# EAGLE board smart_probe (EAGLE 9.6.0)
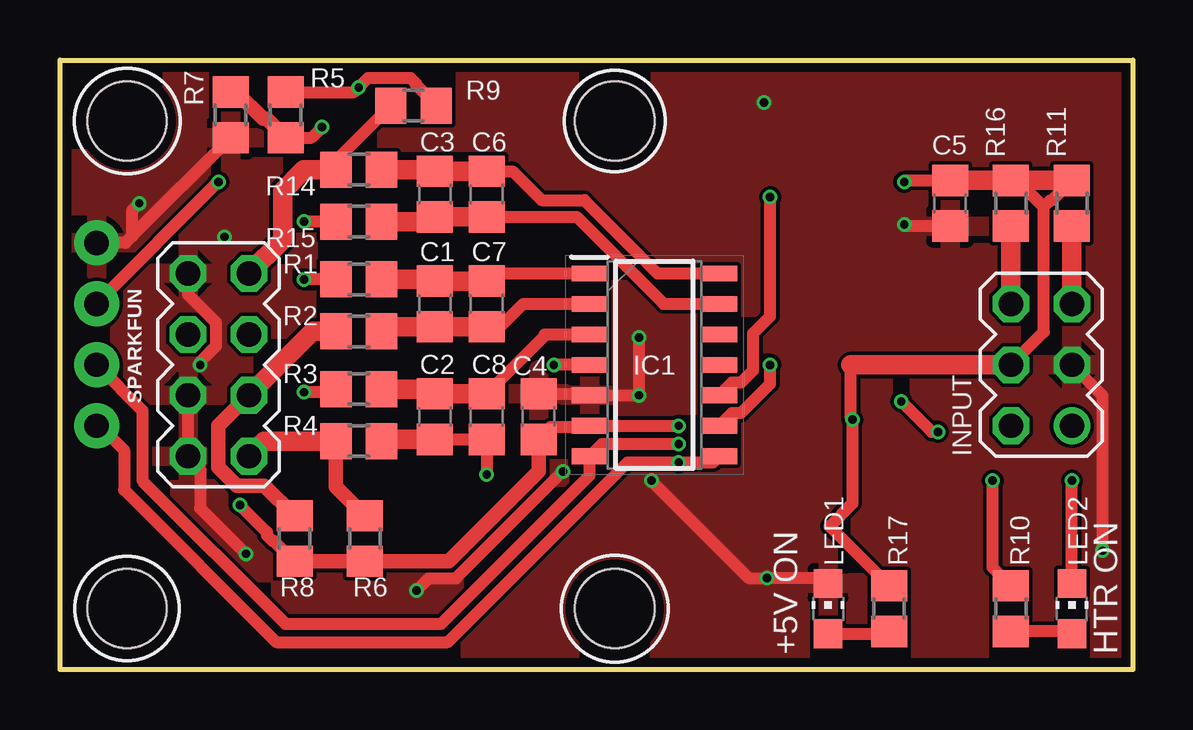
[diagram p0: board, top side]
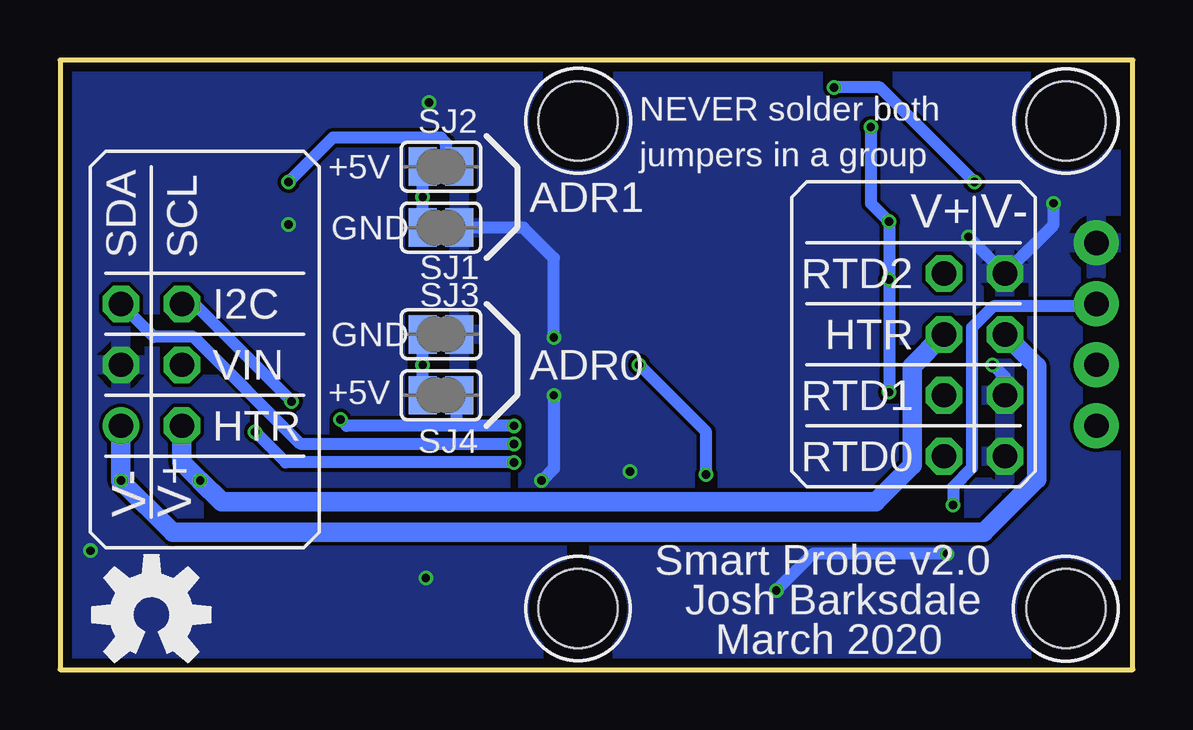
[diagram p1: board, bottom side, seen from below]

Size 44.7 x 25.4 mm. Coordinates in mm from the lower left corner, seen from the top.
Outline: 44.7,0 0,0 0,25.4 44.7,25.4 44.7,0
Copper layers (1*16): Top 0.035559375mm / dielectric 1.6mm / Bottom 0.035559375mm
Design rules "oshpark_2layer": minimum track width 6mil, minimum drill 10mil, track to track 6mil, track to pad 6mil, pad to pad 6mil, via to via 6mil, smd to smd 6mil, copper to edge 15mil, drill to drill 6mil, minimum pad ring 5mil, minimum via ring 5mil, stop-mask expansion 2.5mil, vias tented up to drill 0mil, thermal gap 10mil

## Footprints (pad centres in the part's own frame; a part is rotated, then mirrored left to right if it is on the bottom)
C0805 = smd 1.3 x 1.5: 1 -0.95,0; 2 0.95,0
STAND-OFF = hole 3.302: 0,0
SOIC127P600X175-14N = smd 1.5 x 0.65: 1 -2.7,3.81; 2 -2.7,2.54; 3 -2.7,1.27; 4 -2.7,0; 5 -2.7,-1.27; 6 -2.7,-2.54; 7 -2.7,-3.81; 8 2.7,-3.81; 9 2.7,-2.54; 10 2.7,-1.27; 11 2.7,0; 12 2.7,1.27; 13 2.7,2.54; 14 2.7,3.81
MA03-2 = drill 1.016: 1 -2.54,-1.27 | drill 1.016 octagon: 2 -2.54,1.27; 3 0,-1.27; 4 0,1.27; 5 2.54,-1.27; 6 2.54,1.27
CHIP-LED0805 = smd 1.2 x 1.2: A 0,-1.05; C 0,1.05
MA04-2 = drill 1.016 octagon: 1 -3.81,-1.27; 2 -3.81,1.27; 3 -1.27,-1.27; 4 -1.27,1.27; 5 1.27,-1.27; 6 1.27,1.27; 7 3.81,-1.27; 8 3.81,1.27
R0805 = smd 1.3 x 1.5: 1 -0.95,0; 2 0.95,0
SJ = smd 1.168 x 1.6: 1 -0.762,0; 2 0.762,0
1X04_NO_SILK = drill 1.016 pad 1.88: 1 0,0; 2 2.54,0; 3 5.08,0; 4 7.62,0

## Placement (x,y rotation side)
C1  1u  [C0805]  15.62,15.24 270 top
C2  1u  [C0805]  15.62,10.54 270 top
C3  1u  [C0805]  15.62,19.81 270 top
C4  0.1u  [C0805]  19.94,10.54 90 top
C5  47uF  [C0805]  37.08,19.43 270 top
C6  0.1u  [C0805]  17.78,19.81 270 top
C7  0.1u  [C0805]  17.78,15.24 270 top
C8  0.1u  [C0805]  17.78,10.54 270 top
H1  STAND-OFF  [STAND-OFF]  23.11,2.54 90 top
H2  STAND-OFF  [STAND-OFF]  23.11,22.86 90 top
H3  STAND-OFF  [STAND-OFF]  2.79,2.54 90 top
H4  STAND-OFF  [STAND-OFF]  2.79,22.86 90 top
IC1  MCP3424-E_SL  [SOIC127P600X175-14N]  24.76,12.7 0 top
INPUT  [MA03-2]  40.89,12.7 90 top
LED1  [CHIP-LED0805]  32,2.54 0 top
LED2  [CHIP-LED0805]  42.16,2.54 0 top
LOGO1  OSHW-LOGOM  [OSHW-LOGO-M]  40.89,2.29 0 bottom
PROBE  [MA04-2]  6.6,12.7 270 top
R1  40k  [R0805]  12.45,16.26 0 top
R2  40k  [R0805]  12.45,14.1 0 top
R3  40k  [R0805]  12.45,11.68 0 top
R4  40k  [R0805]  12.45,9.53 0 top
R5  910  [R0805]  9.4,23.11 90 top
R6  910  [R0805]  12.7,5.46 270 top
R7  100  [R0805]  7.11,23.11 90 top
R8  910  [R0805]  9.78,5.46 270 top
R9  910  [R0805]  14.73,23.5 0 top
R10  5k  [R0805]  39.62,2.54 90 top
R11  5k  [R0805]  42.16,19.43 90 top
R14  40k  [R0805]  12.45,20.83 180 top
R15  40k  [R0805]  12.45,18.67 180 top
R16  5k  [R0805]  39.62,19.43 90 top
R17  1.5k  [R0805]  34.54,2.54 90 top
SJ1  [SJ]  28.83,18.41 0 bottom
SJ2  [SJ]  28.83,20.96 0 bottom
SJ3  [SJ]  28.83,13.97 0 bottom
SJ4  [SJ]  28.83,11.43 0 bottom
SPARKFUN  [1X04_NO_SILK]  1.52,17.78 270 top

## Library data of the parts
C1-C8 = rcl; SPICEPREFIX: C
H1-H4 = SparkFun-Hardware
IC1 = MCP3424-E_SL; ALLIED_NUMBER: 70046797; ALLIED_PRICE-STOCK: http://www.alliedelec.com/microchip-technology-inc-mcp3424-e-sl/70046797/; DESCRIPTION: ADC 18-Bit 4-ch 2.048V I2C SOIC14; HEIGHT: 1.75mm; MANUFACTURER_NAME: Microchip; MANUFACTURER_PART_NUMBER: MCP3424-E/SL; MOUSER_PART_NUMBER: 579-MCP3424-E/SL; MOUSER_PRICE-STOCK: https://www.mouser.com/Search/Refine.aspx?Keyword=579-MCP3424-E%2FSL; RS_PART_NUMBER: 6696086P; RS_PRICE-STOCK: http://uk.rs-online.com/web/p/products/6696086P
INPUT PROBE = better_header; OC_FARNELL: unknown; OC_NEWARK: unknown
LED1 LED2 = led
LOGO1 = SparkFun-Aesthetics
R1-R11 R14-R17 = rcl; SPICEPREFIX: R
SJ1-SJ4 = jumper
SPARKFUN = SparkX

## Nets
+5V: C4.1 C5.1 IC1.6 INPUT.4 R5.2 R6.2 R8.2 R9.2 R11.2 R16.2 R17.2 SJ2.2 SJ4.2 SPARKFUN.2
CH1+: C1.1 C7.1 IC1.1 R1.2
CH1-: C1.2 C7.2 IC1.2 R2.2
CH2+: C2.1 C8.1 IC1.3 R3.2
CH2-: C2.2 C8.2 IC1.4 R4.2
CH3+: IC1.11
CH3-: IC1.12
CH4+: C3.2 C6.2 IC1.13 R15.1
CH4-: C3.1 C6.1 IC1.14 R14.1
GND: C4.2 C5.2 IC1.5 INPUT.3 LED1.C PROBE.1 PROBE.5 PROBE.7 R7.1 SJ1.2 SJ3.2 SPARKFUN.1
HTR+: INPUT.2 PROBE.4 R10.2
HTR-: INPUT.1 LED2.C PROBE.3
N$1: LED1.A R17.1
N$2: LED2.A R10.1
N$4: IC1.10 SJ1.1 SJ2.1
N$5: IC1.9 SJ3.1 SJ4.1
RTD0+: PROBE.8 R4.1 R6.1
RTD1+: PROBE.6 R2.1 R8.1
RTD2+: PROBE.2 R9.1 R14.2
SCL(BYPASS): IC1.8 INPUT.6 R16.1 SPARKFUN.4
SDA(BYPASS): IC1.7 INPUT.5 R11.1 SPARKFUN.3
VREF: R1.1 R3.1 R5.1 R7.2 R15.2

## Tracks (layer width: path | path; a pad name or v marks a point on that pad's centre or on a via)
+5V  (via drill 0.35)
  Top 0.508: C4.1 20.45,10.1 21.62,10.1 21.65,10.13 22.03,10.13 IC1.6 v25.78,10.16 | R5.2 12.25,24.06 v12.45,24.26 12.84,24.65 14.6,24.65 14.84,24.41 14.84,24.34 R9.2 | R17.2 32.06,5.97 33.02,6.92 v33.02,10.41 32.95,10.48 32.95,12.7 | SPARKFUN.2 v6.6,20.32 | v7.49,6.86 8.62,5.73 8.62,5.59 8.86,5.36 8.94,5.36 R8.2 | INPUT.4 41,14.07 41,19.29 | R11.2 41.32,19.54 41.25,19.54 41,19.29 | 41,19.29 39.9,20.38 R16.2 | v35.18,20.32 35.24,20.38 C5.1
  Top 0.61: C4.1 19.94,8.26 16.2,4.51 R6.2 R8.2
  Top 0.813: R11.2 R16.2 C5.1 | 32.95,12.7 INPUT.4
  Bottom 0.508: v6.6,20.32 10.54,24.26 v12.45,24.26 | v25.78,10.16 28.19,10.16 | 28.19,10.16 32.77,10.16 v33.02,10.41 | v7.49,6.86 7.49,7.62 6.71,8.41 6.71,14.25 5.82,15.14 1.63,15.14 SPARKFUN.2 | SJ4.2 28.19,11.3 28.19,10.16 | SJ2.2 28.6,21.49 28.6,21.92 28.84,22.16 33.34,22.16 v35.18,20.32
CH1+
  Top 0.508: C7.1 18.1,16.51 IC1.1
  Top 0.813: R1.2 15.56,16.26 C1.1 C7.1
CH1-
  Top 0.508: C7.2 18.35,14.29 19.3,15.24 IC1.2
  Top 0.813: R2.2 13.59,14.29 C1.2 C7.2
CH2+
  Top 0.508: C8.1 20.19,13.9 20.19,13.97 IC1.3
  Top 0.813: R3.2 15.43,11.68 C2.1 C8.1
CH2-  (via drill 0.35)
  Top 0.508: v17.78,8.13 C8.2 C2.2 | IC1.4 v20.57,12.7
  Top 0.813: R4.2 13.46,9.59 C2.2
  Bottom 0.508: v17.78,8.13 17.78,9.91 v20.57,12.7
CH4+
  Top 0.508: C6.2 21.52,18.86 25.15,15.24 IC1.13
  Top 0.813: R15.1 15.43,18.67 C3.2 C6.2
CH4-
  Top 0.508: C6.1 18.86,20.76 20.07,19.56 21.84,19.56 24.32,17.08 24.89,16.51 IC1.14
  Top 0.813: R14.1 15.56,20.83 C3.1 C6.1
GND  (via drill 0.35)
  Top 0.508: C4.2 22,11.49 IC1.5 v24.13,11.43 v24.13,13.84 | C5.2 35.24,18.48 v35.18,18.54 | LED1.C 31.78,3.81 v29.46,3.81 28.7,3.81 v24.64,7.87 | R7.1 3.02,18.07 | 3.02,18.07 2.73,17.78 SPARKFUN.1 | 3.02,18.07 3.02,19.14 v3.3,19.43 | INPUT.3 43.43,11.43 v43.43,4.95 | v7.75,4.83 5.84,6.73 5.84,8.38 PROBE.7 PROBE.5 | v5.84,12.7 5.84,12.83 6.5,13.49 6.5,14.45 5.33,15.62 PROBE.1 | v14.86,3.3 15.36,3.8 16.49,3.8 v20.95,8.26
  Bottom 0.508: v24.13,11.43 24.13,8.38 v24.64,7.87 | v7.75,4.83 13.34,4.83 v14.86,3.3 | v6.86,18.03 PROBE.1 3.3,18.54 v3.3,19.43 | v24.13,13.84 24.13,17.14 25.4,18.41 SJ1.2 | PROBE.5 5.33,12.19 v5.84,12.7
  other vias: 29.34,23.62
  pour Top: -0.13,25.4 44.7,25.4 44.7,0 -0.13,0
  pour Bottom: -0.13,25.4 44.7,25.4 44.7,0 -0.13,0
HTR+  (via drill 0.35)
  Top 0.508: R10.2 38.86,4.25 v38.86,7.87
  Bottom 0.813: PROBE.4 9.2,12.65 9.2,8.51 10.72,6.99 37.97,6.99 v38.86,7.87 39.62,8.64 INPUT.2
HTR-  (via drill 0.35)
  Top 0.508: LED2.C v42.16,7.87
  Bottom 0.813: PROBE.3 4.01,12.65 4.01,7.93 6.22,5.71 40,5.71 v42.16,7.87 INPUT.1
N$1
  Top 0.508: LED1.A 34.44,1.49 R17.1
N$2
  Top 0.508: LED2.A 42.06,1.59 R10.1
N$4  (via drill 0.35)
  Top 0.508: IC1.10 28,11.97 28.38,11.97 28.88,12.47 28.88,14.01 29.59,14.72 v29.59,19.68
  Bottom 0.508: SJ1.1 v29.59,19.68 SJ2.1
N$5  (via drill 0.35)
  Top 0.508: IC1.9 28,10.7 28.38,10.7 29.59,11.91 v29.59,12.7
  Bottom 0.508: SJ4.1 v29.59,12.7 SJ3.1
RTD0+
  Top 0.61: R6.1 11.5,7.62 R4.1
  Top 0.813: PROBE.8 8.51,9.53 R4.1
RTD1+
  Top 0.61: R8.1 8.52,7.67 7.37,7.67 6.6,8.44 6.6,10.16 PROBE.6
  Top 0.813: PROBE.6 10.54,14.1 R2.1
RTD2+
  Top 0.508: R14.2 11.5,21.21 R9.1
  Top 0.813: PROBE.2 9.27,17.91 9.27,19.94 10.16,20.83 R14.2
SCL(BYPASS)  (via drill 0.35)
  Top 0.508: SPARKFUN.4 1.65,10.16 2.67,9.14 2.67,7.49 9.02,1.14 16.16,1.14 23.65,8.64 v25.78,8.64 27.21,8.64 IC1.8 | v36.58,9.91 36.32,9.91 v35.05,11.18
  Top 0.813: R16.1 INPUT.6
  Bottom 0.508: v25.78,8.64 35.31,8.64 v36.58,9.91 | v35.05,11.18 39.12,15.24 INPUT.6
SDA(BYPASS)  (via drill 0.35)
  Top 0.508: SPARKFUN.3 3.43,10.79 3.43,7.87 9.4,1.9 15.88,1.9 22.06,8.1 IC1.7 22.57,9.4 v25.78,9.4
  Top 0.813: R11.1 INPUT.5
  Bottom 0.508: INPUT.5 40.79,13.87 39.14,13.87 34.67,9.4 v25.78,9.4
VREF  (via drill 0.35)
  Top 0.508: R15.2 v10.16,18.67 | R1.1 v10.16,16.26 | R3.1 11.37,11.56 v10.16,11.56 | R5.1 10.48,22.16 v10.92,22.61
  Top 0.61: R5.1 8.61,22.96 8.46,22.96 7.35,24.06 R7.2
  Bottom 0.508: v10.92,22.61 10.92,19.43 v10.16,18.67 v10.16,16.26 v10.16,11.56

## Text on the board
tNames: +5V ON | HTR ON
bNames: NEVER solder both | jumpers in a group | +5V | V- | V+ | ADR1 | GND | RTD2 | SCL | SDA | HTR | I2C | GND | RTD1 | ADR0 | VIN | +5V | RTD0 | HTR | V+ | V- | Smart Probe v2.0 | Josh Barksdale | March 2020